# EAGLE board main (EAGLE 5.07)
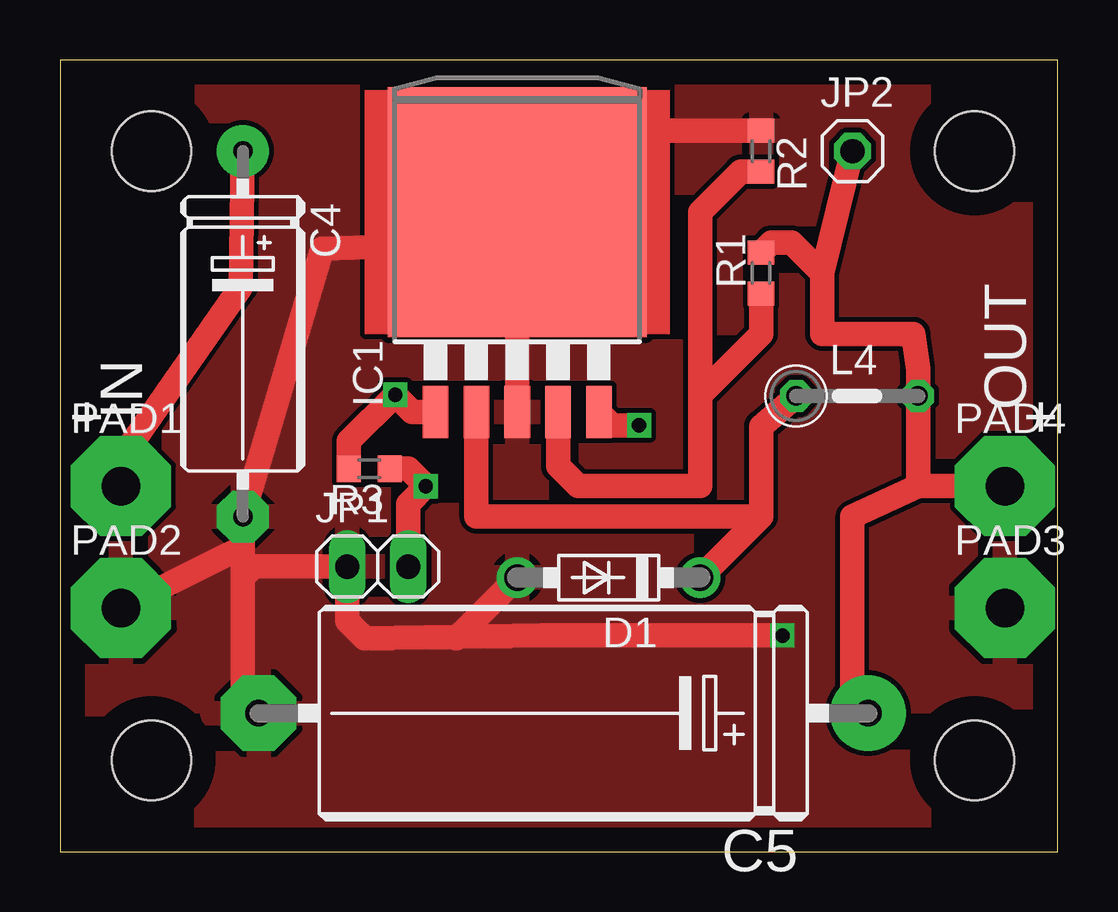
[diagram p0: board, top side]
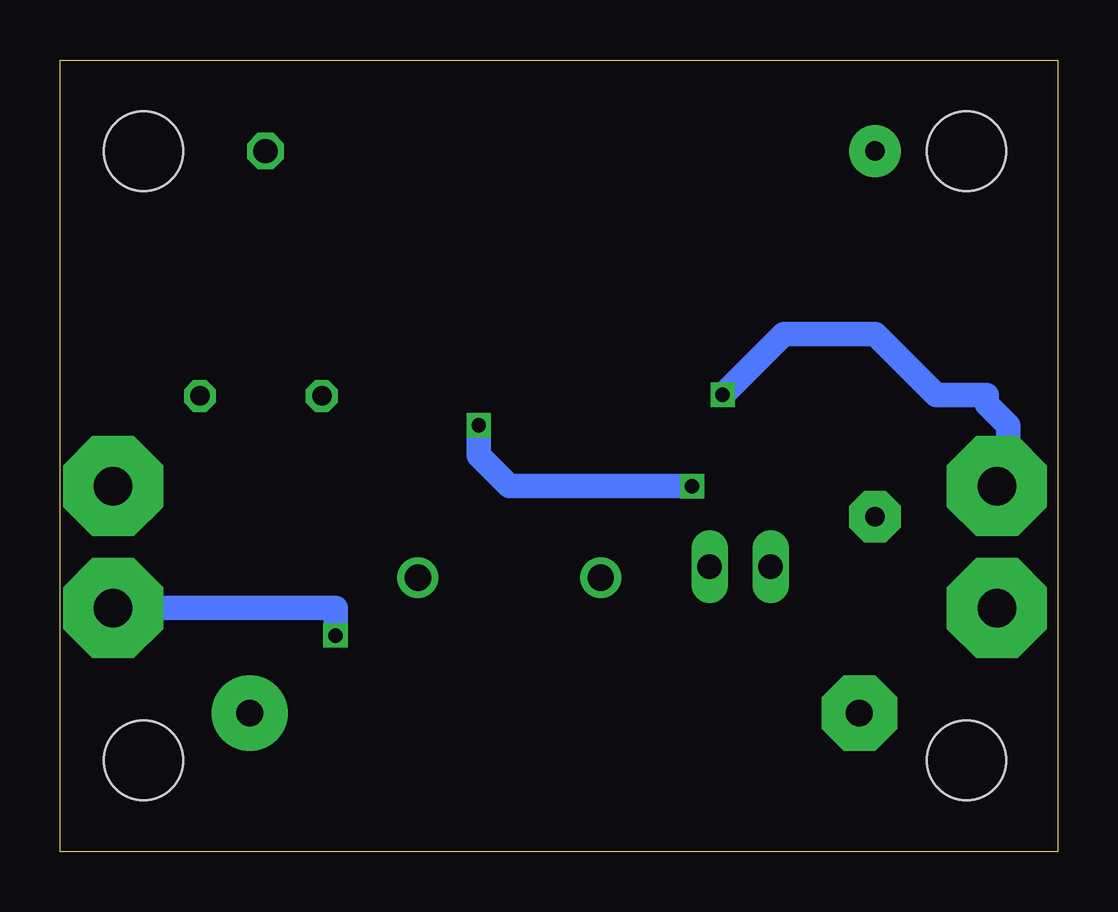
[diagram p1: board, bottom side, seen from below]

Size 41.58 x 33.01 mm. Coordinates in mm from the lower left corner, seen from the top.
Outline: 0,0 41.58,0 41.58,33.01 0,33.01 0,0
Copper layers (1*16): Top 0.035mm / dielectric 1.5mm / Bottom 0.035mm
Design rules "default": minimum track width 10mil, minimum drill 24mil, track to track 8mil, track to pad 8mil, pad to pad 8mil, via to via 8mil, smd to smd 8mil, copper to edge 40mil, drill to drill 8mil, minimum pad ring 10mil, minimum via ring 8mil, stop-mask expansion 4mil, vias tented up to drill 0mil, thermal gap 10mil

## Footprints (pad centres in the part's own frame; a part is rotated, then mirrored left to right if it is on the bottom)
E15-5 = drill 0.813 pad 2.159 round: + -7.62,0 | drill 0.813 pad 2.159 octagon: - 7.62,0
E25-9 = drill 1.118 pad 3.15 round: + -12.7,0 | drill 1.118 pad 3.15 octagon: - 12.7,0
DO41-7.6 = drill 1.1 pad 1.7 round: A 3.81,0; C -3.81,0
TO263-5 = smd 1.067 x 2.159: 1 -3.404,-5.791; 2 -1.702,-5.791; 3 0,-5.791; 4 1.702,-5.791; 5 3.404,-5.791 | smd 10.8 x 10.41: 6 0,2.54
1X02 = drill 1.016 long: 1 -1.27,0; 2 1.27,0
1X01 = drill 1.016 octagon: 1 0,0
STAND-OFF = hole 3.302: 0,0
0207/5V = drill 0.813 octagon: 1 -2.54,0; 2 2.54,0
4,16O1,6 = drill 1.6 pad 4.166 octagon: 1 0,0
R0603 = smd 1 x 1.1: 1 -0.85,0; 2 0.85,0

## Placement (x,y rotation side)
C4  [E15-5]  7.62,21.59 270 top
C5  [E25-9]  20.97,5.78 180 top
D1  1N5819-T  [DO41-7.6]  22.86,11.43 180 top
IC1  [TO263-5]  19.05,24.13 0 top
JP1  [1X02]  13.24,11.89 0 top
JP2  [1X01]  33.02,29.21 0 top
JP3  STAND-OFF  [STAND-OFF]  3.81,29.21 0 top
JP4  STAND-OFF  [STAND-OFF]  38.1,29.21 0 top
JP5  STAND-OFF  [STAND-OFF]  38.1,3.81 0 top
JP6  STAND-OFF  [STAND-OFF]  3.81,3.81 0 top
L4  [0207/5V]  33.21,19 0 top
PAD1  WIREPAD4,16O1,6  [4,16O1,6]  2.54,15.24 0 top
PAD2  WIREPAD4,16O1,6  [4,16O1,6]  2.54,10.16 0 top
PAD3  WIREPAD4,16O1,6  [4,16O1,6]  39.37,10.16 0 top
PAD4  WIREPAD4,16O1,6  [4,16O1,6]  39.37,15.24 0 top
R1  [R0603]  29.21,24.13 90 top
R2  [R0603]  29.21,29.21 270 top
R3  [R0603]  12.89,15.97 180 top

## Library data of the parts
C4 C5 L4 R1-R3 = rcl
D1 = diode
IC1 = linear
JP1 JP2 = pinhead
JP3-JP6 = SparkFun
PAD1-PAD4 = wirepad

## Nets
N$1: C4.+ IC1.1 PAD1.1 R3.2
N$2: C5.+ JP2.1 L4.2 PAD4.1 R1.2
N$3: IC1.4 R1.1 R2.2
N$4: D1.C IC1.2 L4.1
N$7: IC1.5 JP1.2 R3.1
PE: C4.- C5.- D1.A IC1.3 IC1.6 JP1.1 PAD2.1 PAD3.1 R2.1

## Tracks (layer width: path | path; a pad name or v marks a point on that pad's centre or on a via)
N$1  (via drill 0.6)
  Top 1.016: C4.+ 7.54,23.54 2.08,15.7 PAD1.1 | IC1.1 14.68,18.34 v13.97,19.05 12.04,17.12 R3.2
  Bottom 1.016: v13.97,19.05 11.43,21.59 7.62,21.59 5.08,19.05 2.97,19.05 2.97,18.67 2.08,17.78 2.08,15.7 PAD1.1
N$2
  Top 1.016: C5.+ 33.02,5.78 33.02,13.97 35.75,15.24 | 35.75,15.24 L4.2 35.75,20.13 35.56,21.59 31.75,21.59 31.75,24.13 | 31.75,24.13 30.48,25.4 29.63,25.4 R1.2 | 35.75,15.24 PAD4.1 | 31.75,24.13 JP2.1
N$3
  Top 1.016: IC1.4 20.75,16.08 21.59,15.24 26.67,15.24 26.67,19.05 | 26.67,19.05 29.21,21.59 R1.1 | R2.2 28.36,28.36 26.67,26.67 26.67,19.05
N$4
  Top 1.016: L4.1 29.21,17.73 29.21,13.97 | 29.21,13.97 17.35,13.97 IC1.2 | 29.21,13.97 D1.C
N$7  (via drill 0.6)
  Top 1.016: R3.1 14.51,15.97 v15.24,15.24 14.51,14.51 JP1.2 | v24.13,17.78 23.01,17.78 IC1.5
  Bottom 1.016: v15.24,15.24 22.86,15.24 24.13,16.51 v24.13,17.78
PE  (via drill 0.6)
  Top 1.016: IC1.6 IC1.3 | 7.62,12.7 7.62,11.43 | 7.62,12.7 C4.- 10.92,25.15 19.05,25.4 IC1.6 | C5.- 7.62,5.78 7.62,11.43 | R2.1 22.44,30.06 IC1.6 | 7.62,11.43 8.08,11.89 JP1.1 11.97,9.62 12.7,8.89 20.07,9.02 v30.1,9.02 | 16.51,8.89 D1.A | PAD2.1 7.62,12.7
  Bottom 1.016: PAD3.1 30.1,10.16 v30.1,9.02
  pour Top: 0,33.02 0,0 41.91,0 41.91,33.02
(copper drawn outside any net)
  shapes: Top area x1

## Text on the board
tPlace: IN | OUT | + | +